# Altium PCB pipe_nosim_pcb.PcbDoc
Units mm, origin at the board's own origin, x right, y up, seen from the top; angles counter-clockwise.
Board outline 38 x 14 mm, 2 copper layers (Top Layer, Bottom Layer); 4 components, 5 nets, 16 pads, 0 vias.
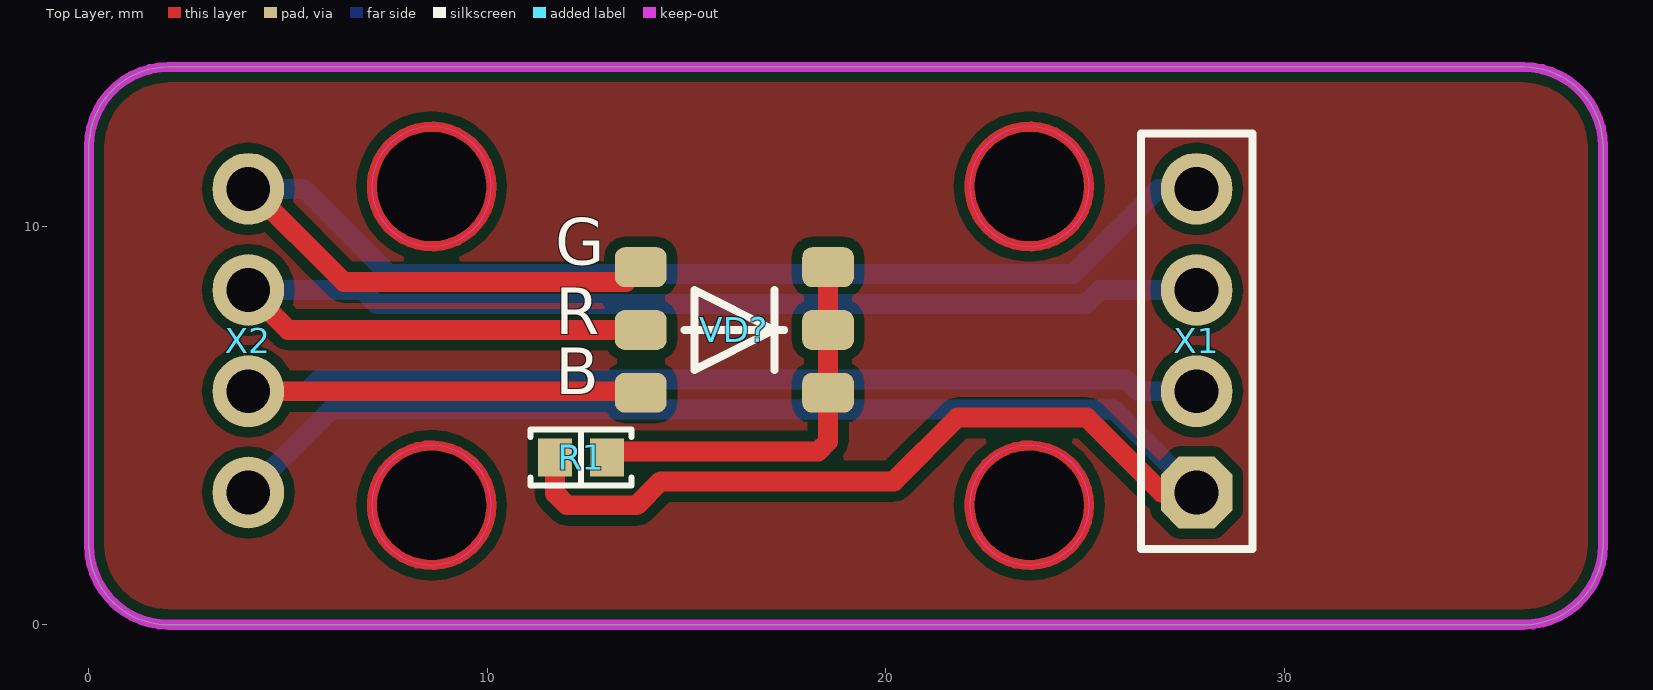
[diagram p0: Top Layer view]
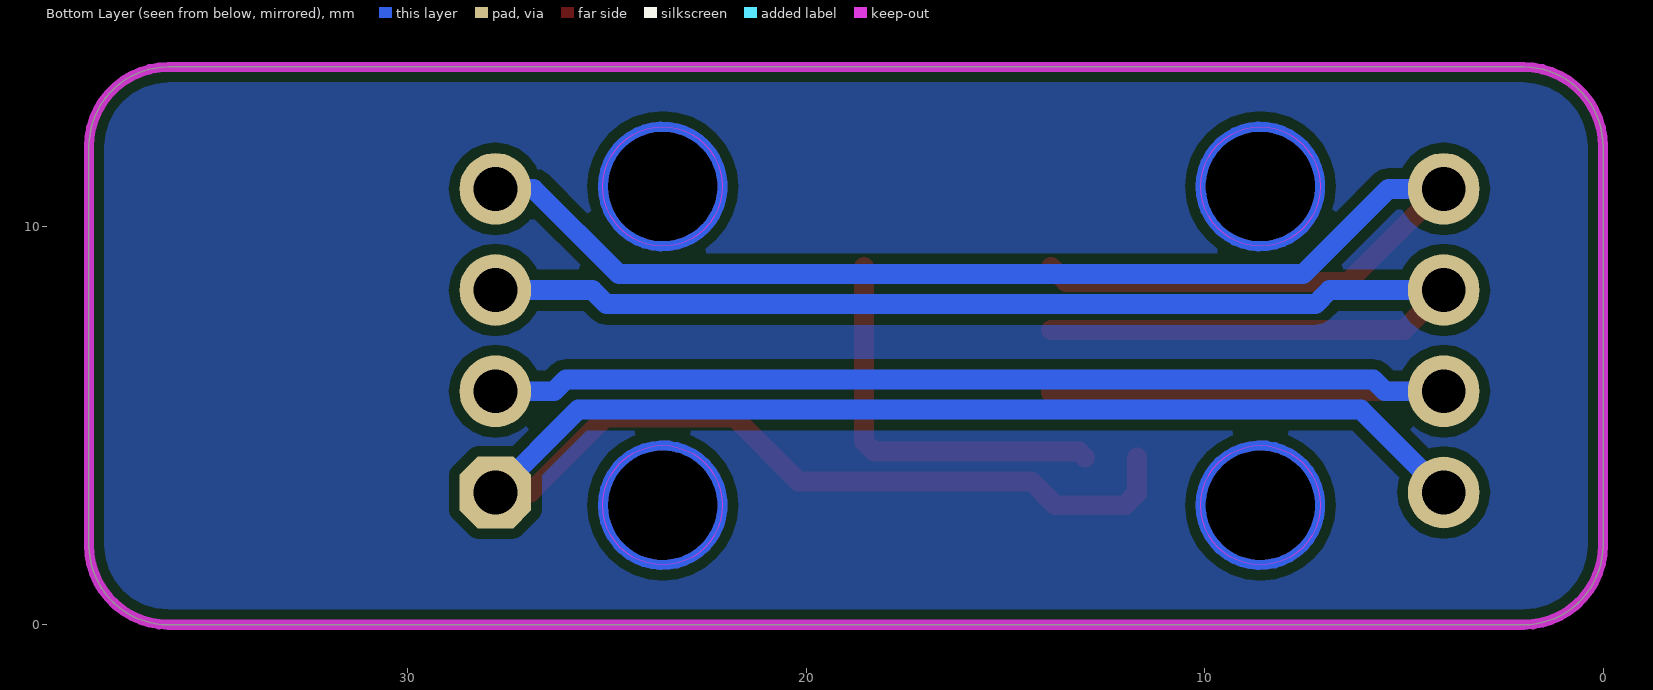
[diagram p1: Bottom Layer view, seen from below]

## Layer stack, top to bottom
Top Solder: solder mask 0.0102, Solder Resist, Dk 3.5
Top Layer: signal copper 0.0356
Dielectric 1: dielectric 0.32, FR-4, Dk 4.8
Bottom Layer: signal copper 0.0356
Bottom Solder: solder mask 0.0102, Solder Resist, Dk 3.5

## Board outline
0,2 0,12 cw(c2,12) 2,14 36,14 cw(c36,12) 38,12 38,2 cw(c36,2) 36,0 2,0 cw(c2,2)
cut-out: 22.1,11 ccw(c23.6,11) 23.6,9.5 ccw(c23.6,11) 25.1,11 ccw(c23.6,11) 23.6,12.5 ccw(c23.6,11)
cut-out: 7.1,11 ccw(c8.6,11) 8.6,9.5 ccw(c8.6,11) 10.1,11 ccw(c8.6,11) 8.6,12.5 ccw(c8.6,11)
cut-out: 7.1,3 ccw(c8.6,3) 8.6,1.5 ccw(c8.6,3) 10.1,3 ccw(c8.6,3) 8.6,4.5 ccw(c8.6,3)
cut-out: 22.1,3 ccw(c23.6,3) 23.6,1.5 ccw(c23.6,3) 25.1,3 ccw(c23.6,3) 23.6,4.5 ccw(c23.6,3)

## Design rules (kind name [scope] priority, off if disabled: settings)
Clearance [All] p1: gap=0.254 ignorepadtopadclearanceinfootprint=FALSE except(0: Arc-Hole Track-Hole SMDPad-Hole THPad-Hole Via-Hole Fill-Hole Poly-Hole Region-Hole Text-Hole)
PolygonConnect [All] p1: connectstyle=Relief reliefconductorwidth=0.254 reliefentries=4 polygonreliefangle="90 Angle" airgapwidth=0.254
RoutingVias [All] p1: holewidth=0.711 width=1.27 viastyle="Through Hole" minholewidth=0.711 minwidth=1.27 maxholewidth=0.711 maxwidth=1.27
SolderMaskExpansion [All] p1: expansion=0.102
Width [All] p1: maxlimit=2 minlimit=0.254 preferedwidth=0.5
30 further rules are at their usual default settings.

## Components (designator, comment, footprint, x,y, rotation, side; value= is the part's Value field where it differs from the comment)
R1 "10 kOhms" "RES 0603_1608" 12.35,4.2 r180 top
VD? "VD?" RGB 16.2,7.4 r0 top
X1 "Connector, 4pin, 2.54mm, 500VAC, 3A" "CON: PBS-4 R" 27.8,7.13 r90 top
X2 "Connector, 4pin, 2.54mm, 500VAC, 3A" "4PLS RIGHT ANGLE 2" 4,7.13 r90 top

## Footprints (in the part's own frame and the unit in brackets; to place one, negate y for a bottom-side part, rotate by r counter-clockwise, add the part's x,y. Pads: shape width x height; smd on the part's side, far side on the other; paste and mask are expansions set on the pad)
"4PLS RIGHT ANGLE 2" [mm]
  round 1.8 hole 1.1: 1(-3.81,0) 2(-1.27,0) 3(1.27,0) 4(3.81,0)
  body extent -5.04,-0.32 5.14,10.04, height 2.57
"CON: PBS-4 R" [mm] "PBS-5"
  oct 1.8x1.8 hole 1.1: 1(-3.81,0)
  round 1.8 hole 1.1: 2(-1.27,0) 3(1.27,0) 4(3.81,0)
  silkscreen extent -5.23,-1.4 5.2,1.4, body extent -5.08,-10.2 5.08,0, height 2.54
"RES 0603_1608" [mm] "Chip Resistor, 2-Leads, Body 1.60x0.80mm, IPC Medium Density"
  rect 0.85x0.95 smd: 1(-0.65,0) 2(0.65,0)
  silkscreen extent -1.27,-0.7 1.27,0.7, body extent -0.8,-0.4 0.8,0.4, height 0.45
RGB [mm]
  rrect50% 1.3x1 smd: 1(2.35,1.575) 2(2.35,0) 3(2.35,-1.575) 4(-2.35,1.575) 5(-2.35,0) 6(-2.35,-1.575)
  silkscreen extent -1.25,-1 1.25,1, body extent -1.8,-1.75 1.8,1.75, height 2.01

## Part data
R1: library part RNCS0603BKE10K0, "RES 10K OHM 0.1% 1/16W 0603", Device Package="0603 (1608 Metric)", Manufacturer="Stackpole Electronics Inc", Operating Temperature="-55°C ~ 155°C", Power (Watts)="0.063W, 1/16W", Ratings=AEC-Q200, Supplier Device Package=0603, Supplier Part Number 1=RNCS0603BKE10K0CT-ND, Temperature Coefficient=±25ppm/°C, Tolerance=±0.1%, ComponentLink1Description=Datasheet, ComponentLink1URL=https://www.seielect.com/catalog/sei-rncs_rnch.pdf, ComponentLink2Description="DigiKey Link", ComponentLink2URL=http://digikey.com/product-detail/en/stackpole-electronics-inc/RNCS0603BKE10K0/RNCS0603BKE10K0CT-ND/1800113, Composition="Thin Film", Features="Anti-Corrosive, Automotive AEC-Q200, Moisture Resistant", Height - Seated (Max)="0.022\" (0.55mm)", LastUpdated="21.01.2020 0:25:01", Lifecycle Status=Active, Minimum Order=1, Number of Terminations=2, Package / Case="0603 (1608 Metric)", Packaging=TapeAndReel, PartId=4838, Part Number=RNCS0603BKE10K0, Part Status=Active, Price=0.08, Resistance="10 kOhms", Series=RNCS, Size / Dimension="0.061\" L x 0.031\" W (1.55mm x 0.80mm)", Supplier 1=DigiKey
VD?: library part RGB
X1: library part PBS-4, CurrentMax=3A, Manufacturer=Connfly, VoltageMax=500VAC, CommentText=мама, HelpURL=https://www.chipdip.ru/product/pbs-4, Multichannel=4pin, PartNumber=PBS-4, Pitch=2.54mm, TypeConnector=Connector, ValueManufacturerPartNumber="Connector, 4pin, 2.54mm, 500VAC, 3A"
X2: library part PLS-4, CurrentMax=3A, Manufacturer=Connfly, VoltageMax=500VAC, CommentText=папа, HelpURL=https://www.chipdip.ru/product/pls-4, Multichannel=4pin, PartNumber=PLS-4, Pitch=2.54mm, TypeConnector=Connector, ValueManufacturerPartNumber="Connector, 4pin, 2.54mm, 500VAC, 3A"

## Nets (pads, with @x,y where several pads share a name; then routed paths per layer and width w, separated by ;. In a path a pad name is that pad's centre, name@x,y a point inside that pad or via, vN(x,y) a via of type N, cw(c..) or ccw(c..) an arc to the next point about the centre after c; other vN are vias at no path point)
NetR1_1: R1.1 VD?.1 VD?.2 VD?.3 | length 10.1
  Top Layer w0.5: R1.1 13.154,4.354 18.304,4.354 18.55,4.6 VD?.3 VD?.2 VD?.1
NetR1_2: R1.2 X1.1 X2.1 | length 44.3
  Top Layer w0.5: R1.2 11.7,3.3 12,3 13.748,3 14.348,3.6 20.2,3.6 21.8,5.2 25.042,5.2 26.922,3.32 X1.1
  Bottom Layer w0.5: X2.1 6.08,5.4 25.72,5.4 X1.1
NetVD?_4: VD?.4 X1.4 X2.4 | length 36.5
  Top Layer w0.5: X2.4 4.06,10.94 6.4,8.6 13.475,8.6 VD?.4
  Bottom Layer w0.5: X2.4 5.389,10.94 7.529,8.8 24.7,8.8 26.84,10.94 X1.4
NetVD?_5: VD?.5 X1.3 X2.3 | length 34.4
  Top Layer w0.5: X2.3 5,7.4 VD?.5
  Bottom Layer w0.5: X2.3 6.863,8.4 7.217,8.046 25.012,8.046 25.366,8.4 X1.3
NetVD?_6: VD?.6 X1.2 X2.2 | length 33.9
  Top Layer w0.5: X2.2 13.815,5.86 VD?.6
  Bottom Layer w0.5: X2.2 5.474,5.86 5.768,6.154 26.032,6.154 26.326,5.86 X1.2

## Polygon pours and split planes (outlines as drawn)
no net on Top Layer "Top Layer-No Net" (solid, pour order 0): 0,2 0,12 cw(c2,12) 2,14 36,14 cw(c36,12) 38,12 38,2 cw(c36,2) 36,0 2,0 cw(c2,2)
no net on Bottom Layer "Top Layer-No Net1" (solid, pour order 1): 0,2 0,12 cw(c2,12) 2,14 36,14 cw(c36,12) 38,12 38,2 cw(c36,2) 36,0 2,0 cw(c2,2)

## Keep-outs
Keep-Out Layer:
  the board outline again, w0.254

## Other copper
Multi-Layer:
  circle w0.254: c23.6,11 r1.5
  circle w0.254: c23.6,3 r1.5
  circle w0.254: c8.6,3 r1.5
  circle w0.254: c8.6,11 r1.5

## Text inside footprints (layer, text, board x,y; h text height)
VD?: Top Overlay "B" at 11.7,5.4 h2; Top Overlay "R" at 11.7,6.9 h2; Top Overlay "G" at 11.7,8.65 h2